# EAGLE board led_table_signals_unrouted (EAGLE 7.6.0)
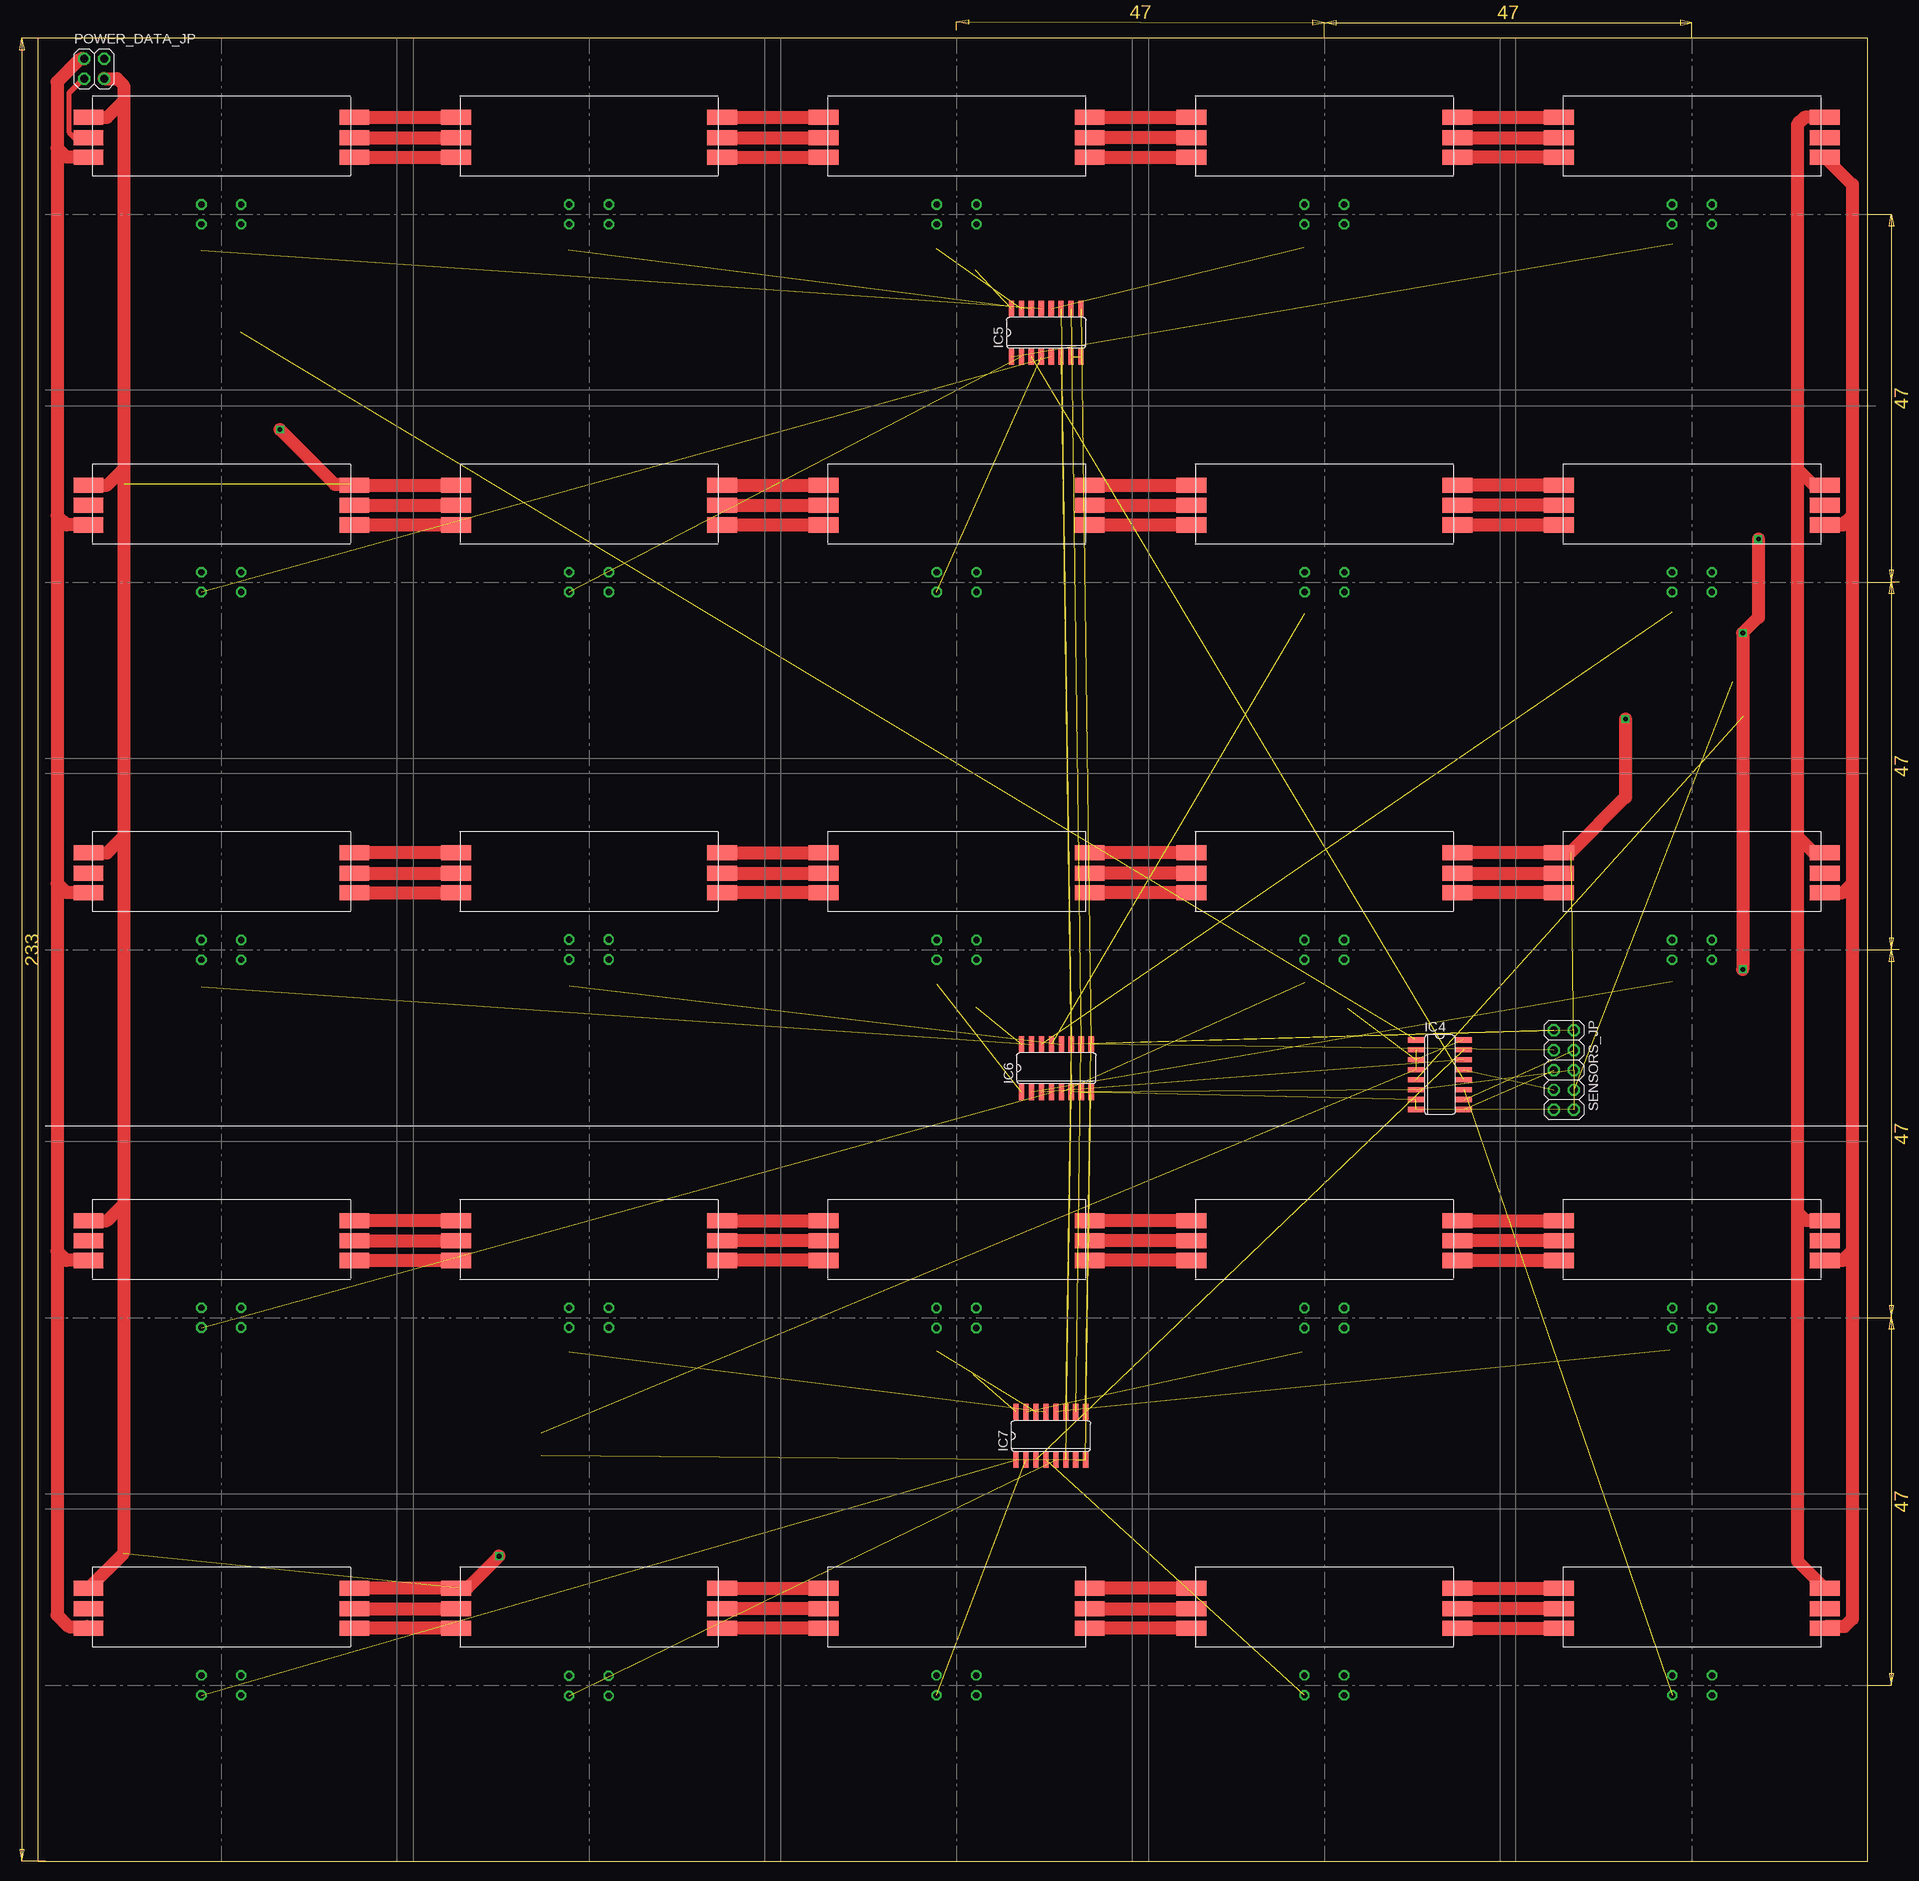
[diagram p0: board, top side]
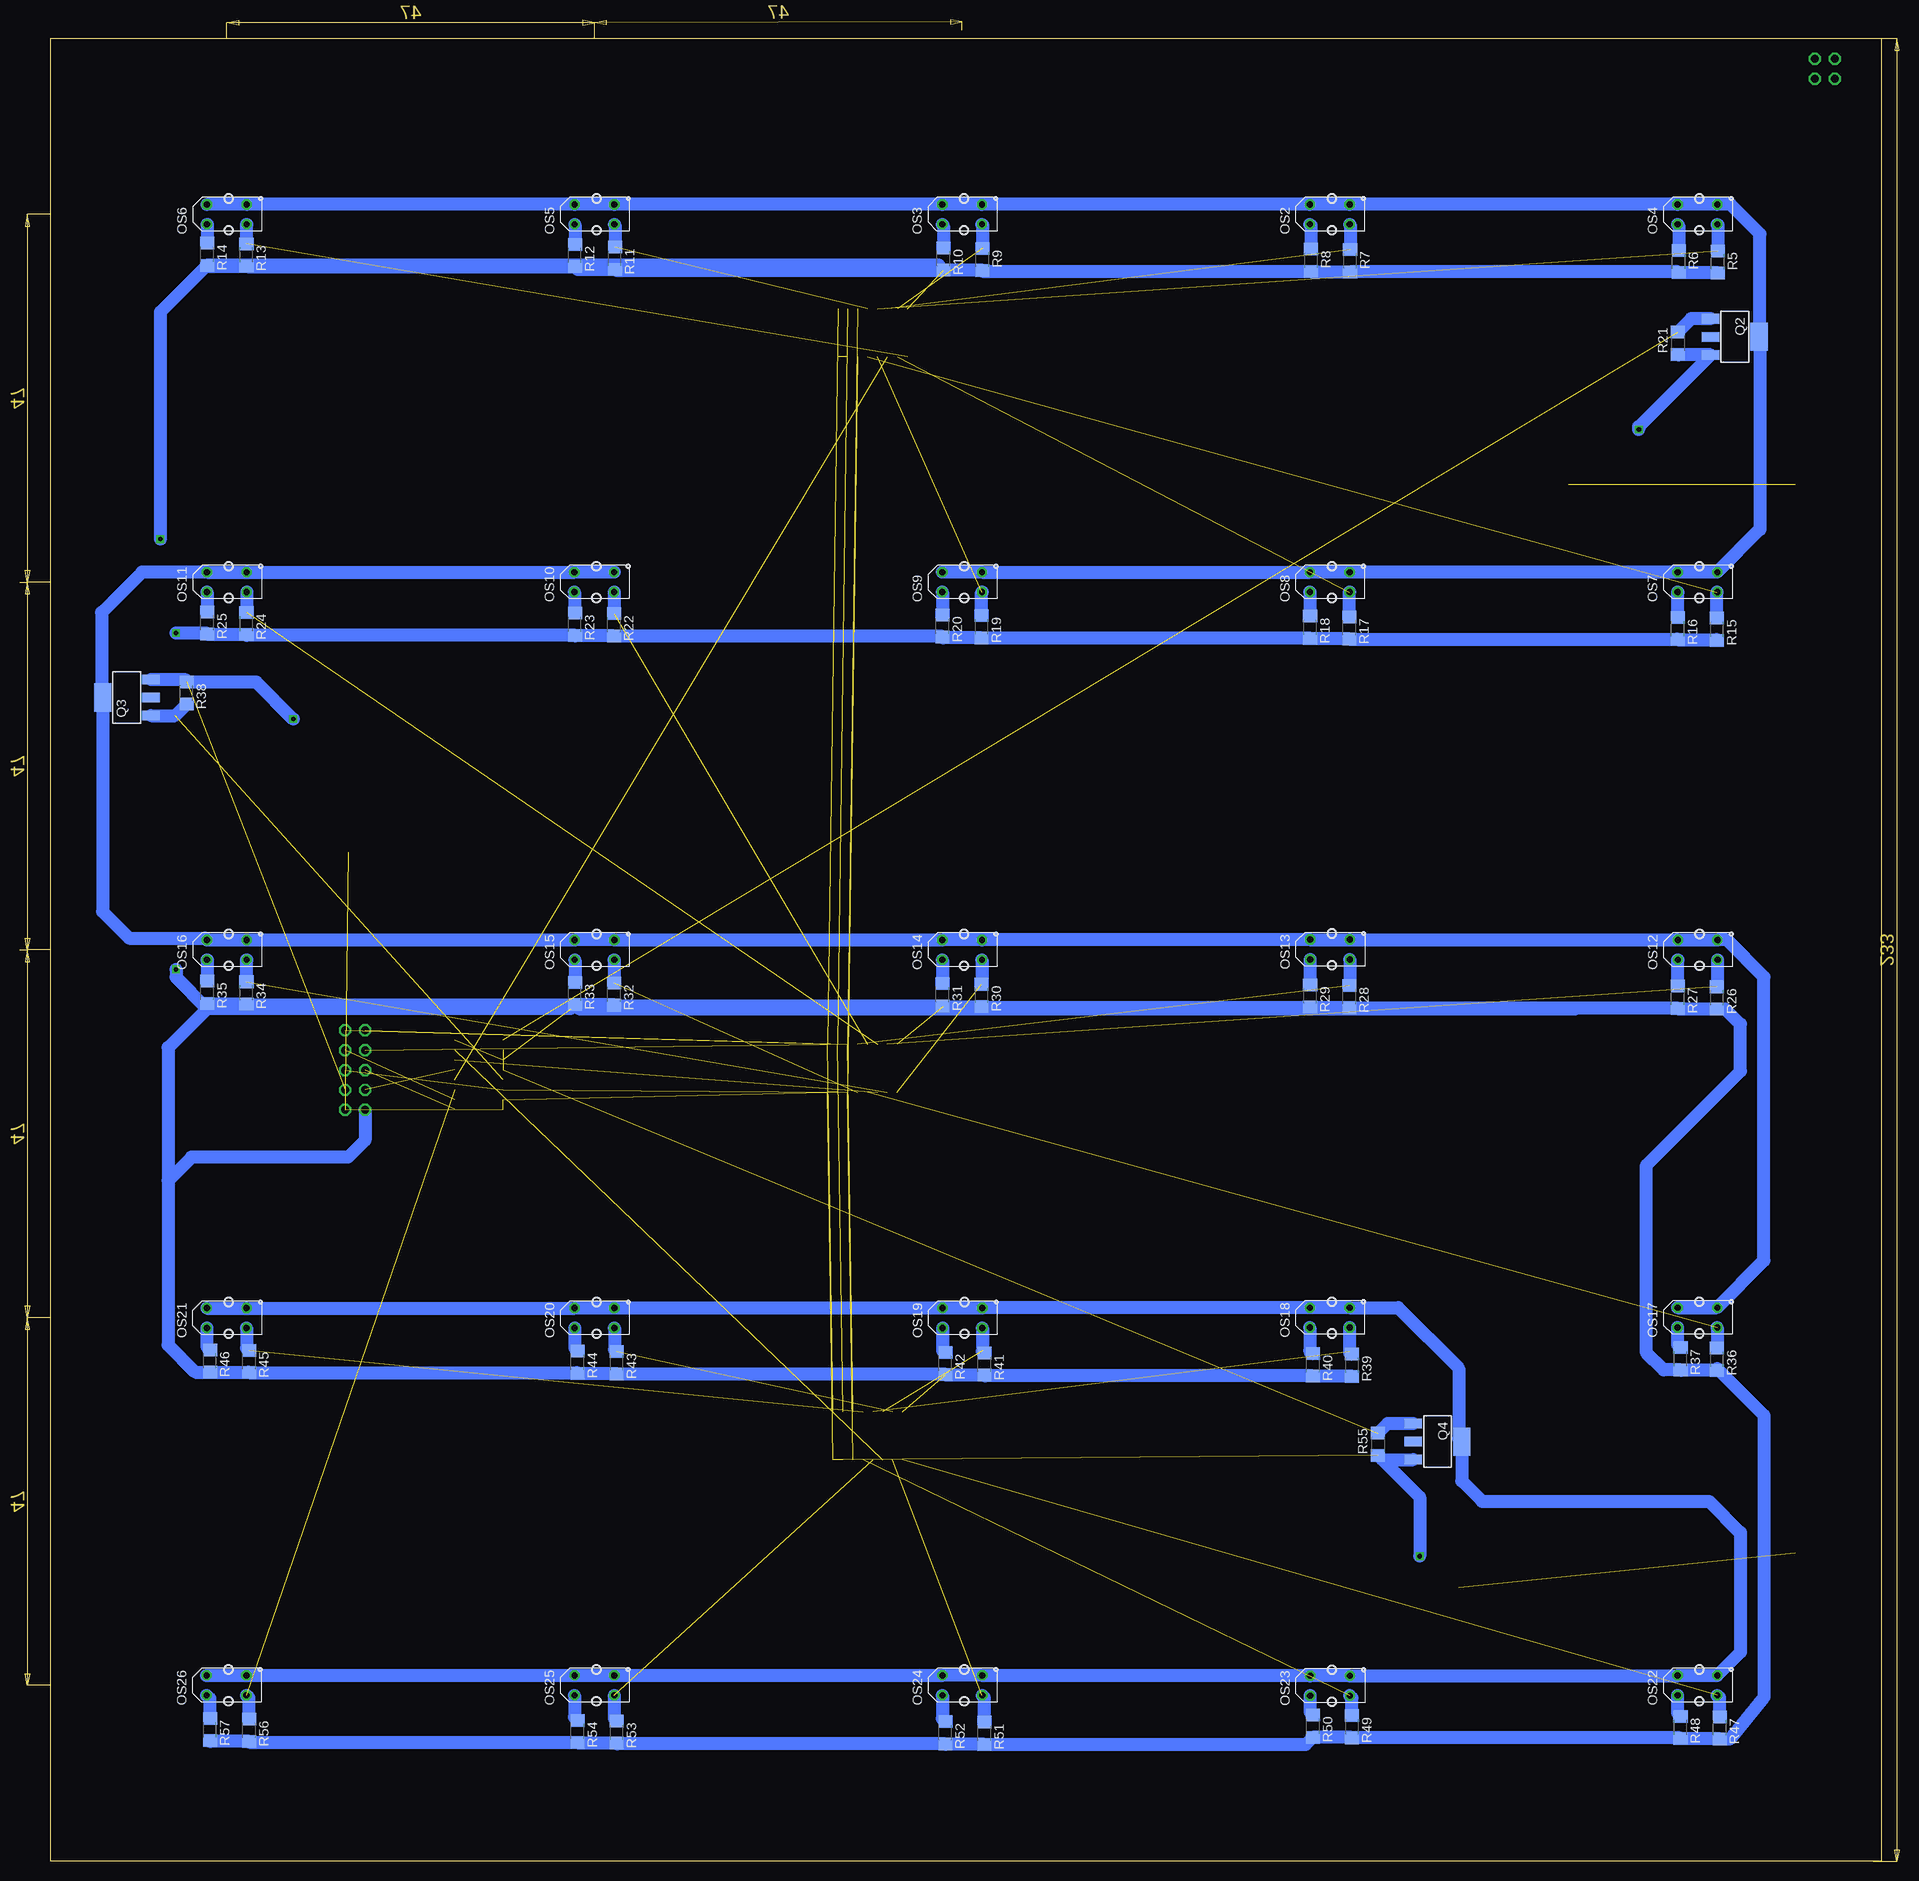
[diagram p1: board, bottom side, seen from below]

Size 234 x 233 mm. Coordinates in mm from the lower left corner, seen from the top.
Outline: 234,233 0,233 0,0 234,0 234,233
Copper layers (1*16): Top 0.035mm / dielectric 1.5mm / Bottom 0.035mm
Design rules "default": minimum track width 10mil, minimum drill 24mil, track to track 8mil, track to pad 8mil, pad to pad 8mil, via to via 8mil, smd to smd 8mil, copper to edge 40mil, drill to drill 8mil, minimum pad ring 10mil, minimum via ring 8mil, stop-mask expansion 4mil, vias tented up to drill 0mil, thermal gap 10mil

## Footprints (pad centres in the part's own frame; a part is rotated, then mirrored left to right if it is on the bottom)
SO16 = smd 0.66 x 2.032: 1 -4.445,-3.073; 2 -3.175,-3.073; 3 -1.905,-3.073; 4 -0.635,-3.073; 5 0.635,-3.073; 6 1.905,-3.073; 7 3.175,-3.073; 8 4.445,-3.073; 9 4.445,3.073; 10 3.175,3.073; 11 1.905,3.073; 12 0.635,3.073; 13 -0.635,3.073; 14 -1.905,3.073; 15 -3.175,3.073; 16 -4.445,3.073
TCRT5000 = drill 0.8 octagon: A -2.54,-1.27; C 2.54,-1.27; E 2.54,1.27; K -2.54,1.27
2X02 = drill 1.016 octagon: 1 -1.27,-1.27; 2 -1.27,1.27; 3 1.27,-1.27; 4 1.27,1.27
SOT223 = smd 1.219 x 2.235: 1 -2.311,-3.099; 2 0,-3.099; 3 2.311,-3.099 | smd 3.6 x 2.2: 4 0,3.099
R1206 = smd 1.6 x 1.803: 1 -1.422,0; 2 1.422,0
2X05 = drill 1.016 octagon: 1 -5.08,-1.27; 2 -5.08,1.27; 3 -2.54,-1.27; 4 -2.54,1.27; 5 0,-1.27; 6 0,1.27; 7 2.54,-1.27; 8 2.54,1.27; 9 5.08,-1.27; 10 5.08,1.27
WS_PIN = smd 1.93 x 3.81: DATA_IN 0.2,-17; DATA_OUT 0.2,17; GND_IN -2.4,-17; GND_OUT -2.4,17; VCC_IN 2.7,-17; VCC_OUT 2.7,17

## Placement (x,y rotation side)
IC4  4052D  [SO16]  179.28,100.54 270 top
IC5  4051D  [SO16]  128.95,195.38 0 top
IC6  4051D  [SO16]  130.25,101.38 0 top
IC7  4051D  [SO16]  129.55,54.38 0 top
OS2  [TCRT5000]  70.5,210.5 0 bottom
OS3  [TCRT5000]  117.51,210.5 0 bottom
OS4  [TCRT5000]  23.5,210.5 0 bottom
OS5  [TCRT5000]  164.5,210.5 0 bottom
OS6  [TCRT5000]  211.5,210.5 0 bottom
OS7  [TCRT5000]  23.5,163.5 0 bottom
OS8  [TCRT5000]  70.5,163.5 0 bottom
OS9  [TCRT5000]  117.49,163.5 0 bottom
OS10  [TCRT5000]  164.52,163.5 0 bottom
OS11  [TCRT5000]  211.5,163.5 0 bottom
OS12  [TCRT5000]  23.48,116.5 0 bottom
OS13  [TCRT5000]  70.48,116.55 0 bottom
OS14  [TCRT5000]  117.5,116.5 0 bottom
OS15  [TCRT5000]  164.5,116.5 0 bottom
OS16  [TCRT5000]  211.5,116.5 0 bottom
OS17  [TCRT5000]  23.5,69.5 0 bottom
OS18  [TCRT5000]  70.5,69.5 0 bottom
OS19  [TCRT5000]  117.46,69.45 0 bottom
OS20  [TCRT5000]  164.49,69.45 0 bottom
OS21  [TCRT5000]  211.52,69.45 0 bottom
OS22  [TCRT5000]  23.5,22.5 0 bottom
OS23  [TCRT5000]  70.48,22.45 0 bottom
OS24  [TCRT5000]  117.48,22.5 0 bottom
OS25  [TCRT5000]  164.51,22.5 0 bottom
OS26  [TCRT5000]  211.54,22.5 0 bottom
POWER_DATA_JP  [2X02]  7.23,229.11 0 top
Q2  N-HEXFET_SOT323-IRLL014N  [SOT223]  18.72,194.85 270 bottom
Q3  N-HEXFET_SOT323-IRLL014N  [SOT223]  224.28,148.75 90 bottom
Q4  N-HEXFET_SOT323-IRLL014N  [SOT223]  56.72,53.65 270 bottom
R5  10k  [R1206]  20.89,204.41 270 bottom
R6  100  [R1206]  25.89,204.49 270 bottom
R7  10k  [R1206]  67.89,204.57 270 bottom
R8  100  [R1206]  72.89,204.65 270 bottom
R9  10k  [R1206]  114.89,204.73 270 bottom
R10  100  [R1206]  119.89,204.81 270 bottom
R11  10k  [R1206]  161.89,204.89 270 bottom
R12  100  [R1206]  167,205.24 270 bottom
R13  10k  [R1206]  209,205.32 270 bottom
R14  100  [R1206]  214,205.4 270 bottom
R15  10k  [R1206]  21,157.48 270 bottom
R16  100  [R1206]  26,157.56 270 bottom
R17  10k  [R1206]  68,157.64 270 bottom
R18  100  [R1206]  73,157.72 270 bottom
R19  10k  [R1206]  115,157.8 270 bottom
R20  100  [R1206]  120,157.88 270 bottom
R21  10k  [R1206]  26,194.04 90 bottom
R22  10k  [R1206]  162,158.04 270 bottom
R23  100  [R1206]  167,158.12 270 bottom
R24  10k  [R1206]  209,158.2 270 bottom
R25  100  [R1206]  214,158.28 270 bottom
R26  10k  [R1206]  21,110.36 270 bottom
R27  100  [R1206]  26,110.44 270 bottom
R28  10k  [R1206]  68,110.52 270 bottom
R29  100  [R1206]  73,110.6 270 bottom
R30  10k  [R1206]  115,110.68 270 bottom
R31  100  [R1206]  120,110.76 270 bottom
R32  10k  [R1206]  162,110.84 270 bottom
R33  100  [R1206]  167,110.92 270 bottom
R34  10k  [R1206]  209,111 270 bottom
R35  100  [R1206]  214,111.08 270 bottom
R36  10k  [R1206]  21,64.16 270 bottom
R37  100  [R1206]  25.65,64.24 270 bottom
R38  10k  [R1206]  216.65,149.32 270 bottom
R39  10k  [R1206]  67.65,63.4 270 bottom
R40  100  [R1206]  72.65,63.48 270 bottom
R41  10k  [R1206]  114.65,63.56 270 bottom
R42  100  [R1206]  119.65,63.64 270 bottom
R43  10k  [R1206]  161.65,63.72 270 bottom
R44  100  [R1206]  166.65,63.8 270 bottom
R45  10k  [R1206]  208.65,63.88 270 bottom
R46  100  [R1206]  213.65,63.96 270 bottom
R47  10k  [R1206]  20.65,17.04 270 bottom
R48  100  [R1206]  25.65,17.12 270 bottom
R49  10k  [R1206]  67.65,17.2 270 bottom
R50  100  [R1206]  72.65,17.28 270 bottom
R51  10k  [R1206]  114.65,16.36 270 bottom
R52  100  [R1206]  119.65,16.44 270 bottom
R53  10k  [R1206]  161.65,16.52 270 bottom
R54  100  [R1206]  166.65,16.6 270 bottom
R55  10k  [R1206]  64.35,53.32 90 bottom
R56  10k  [R1206]  208.65,16.76 270 bottom
R57  100  [R1206]  213.65,16.84 270 bottom
SENSORS_JP  [2X05]  195.11,101.13 270 top
U$1  WS2812_ON_STRIP  [WS_PIN]  23.5,79.5 270 top
U$2  WS2812_ON_STRIP  [WS_PIN]  70.5,79.5 270 top
U$3  WS2812_ON_STRIP  [WS_PIN]  117.5,79.5 270 top
U$4  WS2812_ON_STRIP  [WS_PIN]  164.5,79.5 270 top
U$5  WS2812_ON_STRIP  [WS_PIN]  211.5,79.5 270 top
U$6  WS2812_ON_STRIP  [WS_PIN]  23.5,32.5 270 top
U$7  WS2812_ON_STRIP  [WS_PIN]  70.5,32.5 270 top
U$8  WS2812_ON_STRIP  [WS_PIN]  117.5,32.5 270 top
U$9  WS2812_ON_STRIP  [WS_PIN]  164.5,32.5 270 top
U$10  WS2812_ON_STRIP  [WS_PIN]  211.5,32.5 270 top
U$11  WS2812_ON_STRIP  [WS_PIN]  23.5,126.5 270 top
U$12  WS2812_ON_STRIP  [WS_PIN]  70.5,126.5 270 top
U$13  WS2812_ON_STRIP  [WS_PIN]  117.5,126.5 270 top
U$14  WS2812_ON_STRIP  [WS_PIN]  164.5,126.5 270 top
U$15  WS2812_ON_STRIP  [WS_PIN]  211.5,126.5 270 top
U$16  WS2812_ON_STRIP  [WS_PIN]  23.5,220.5 270 top
U$17  WS2812_ON_STRIP  [WS_PIN]  70.5,220.5 270 top
U$18  WS2812_ON_STRIP  [WS_PIN]  117.5,220.5 270 top
U$19  WS2812_ON_STRIP  [WS_PIN]  164.5,220.5 270 top
U$20  WS2812_ON_STRIP  [WS_PIN]  211.5,220.5 270 top
U$21  WS2812_ON_STRIP  [WS_PIN]  23.5,173.5 270 top
U$22  WS2812_ON_STRIP  [WS_PIN]  70.5,173.5 270 top
U$23  WS2812_ON_STRIP  [WS_PIN]  117.5,173.5 270 top
U$24  WS2812_ON_STRIP  [WS_PIN]  164.5,173.5 270 top
U$25  WS2812_ON_STRIP  [WS_PIN]  211.5,173.5 270 top

## Library data of the parts
IC4-IC7 = 40xx
OS2-OS26 = tcrt5000
POWER_DATA_JP SENSORS_JP = pinhead
Q2-Q4 = transistor-power
R5-R57 = rcl
U$1-U$25 = ws2812_on_strip

## Nets
+5V: IC4.3 IC4.16 IC5.16 IC6.16 IC7.16 R5.2 R6.2 R7.2 R8.2 R9.2 R10.2 R11.2 R12.2 R13.2 R14.2 R15.2 R16.2 R17.2 R18.2 R19.2 R20.2 R22.2 R23.2 R24.2 R25.2 R26.2 R27.2 R28.2 R29.2 R30.2 R31.2 R32.2 R33.2 R34.2 R35.2 R36.2 R37.2 R39.2 R40.2 R41.2 R42.2 R43.2 R44.2 R45.2 R46.2 R47.2 R48.2 R49.2 R50.2 R51.2 R52.2 R53.2 R54.2 R56.2 R57.2 SENSORS_JP.9
A: IC5.11 IC6.11 IC7.11 SENSORS_JP.1
B: IC5.10 IC6.10 IC7.10 SENSORS_JP.2
C: IC5.9 IC6.9 IC7.9 SENSORS_JP.3
D: IC4.10 SENSORS_JP.4
DATA_IN: POWER_DATA_JP.1 U$16.DATA_IN
DATA_OUT: U$10.DATA_OUT
E: IC4.9 SENSORS_JP.5
EN: IC4.6 IC5.6 IC6.6 IC7.6 SENSORS_JP.6
GND: IC4.7 IC4.8 IC5.7 IC5.8 IC6.7 IC6.8 IC7.7 IC7.8 POWER_DATA_JP.3 Q2.3 Q3.3 Q4.3 R21.1 R38.1 R55.1 SENSORS_JP.8 SENSORS_JP.10 U$1.GND_IN U$6.GND_IN U$11.GND_IN U$16.GND_IN U$21.GND_IN
GND_OUT: U$5.GND_OUT U$10.GND_OUT U$15.GND_OUT U$20.GND_OUT U$25.GND_OUT
LED_VCC: POWER_DATA_JP.2 U$1.VCC_IN U$6.VCC_IN U$11.VCC_IN U$16.VCC_IN U$21.VCC_IN
N$1: U$1.VCC_OUT U$2.VCC_IN
N$2: U$1.DATA_OUT U$2.DATA_IN
N$3: U$1.GND_OUT U$2.GND_IN
N$4: U$2.VCC_OUT U$3.VCC_IN
N$5: U$2.DATA_OUT U$3.DATA_IN
N$6: U$2.GND_OUT U$3.GND_IN
N$7: U$3.VCC_OUT U$4.VCC_IN
N$8: U$3.DATA_OUT U$4.DATA_IN
N$9: U$3.GND_OUT U$4.GND_IN
N$10: U$4.VCC_OUT U$5.VCC_IN
N$11: OS4.A R6.1
N$12: IC5.13 OS4.C R5.1
N$13: IC5.14 OS2.C R7.1
N$14: IC5.15 OS3.C R9.1
N$15: OS2.A R8.1
N$16: IC5.1 OS6.C R13.1
N$17: IC6.13 OS10.C R22.1
N$18: OS3.A R10.1
N$19: OS10.A R23.1
N$20: IC5.12 OS5.C R11.1
N$21: OS5.A R12.1
N$22: IC6.14 OS11.C R24.1
N$23: OS11.A R25.1
N$24: OS6.A R14.1
N$25: OS12.A R27.1
N$26: IC5.5 OS7.C R15.1
N$27: OS7.A R16.1
N$28: IC6.12 OS13.C R28.1
N$29: IC5.2 OS8.C R17.1
N$30: OS8.A R18.1
N$31: OS2.E OS2.K OS3.E OS3.K OS4.E OS4.K OS5.E OS5.K OS6.E OS6.K OS7.E OS7.K OS8.E OS8.K OS9.E OS9.K Q2.4
N$32: IC5.4 OS9.C R19.1
N$33: OS9.A R20.1
N$34: OS13.A R29.1
N$35: U$4.DATA_OUT U$5.DATA_IN
N$36: OS14.A R31.1
N$37: IC6.5 OS15.C R32.1
N$38: OS15.A R33.1
N$39: IC6.2 OS16.C R34.1
N$40: OS16.A R35.1
N$41: OS10.E OS10.K OS11.E OS11.K OS12.E OS12.K OS13.E OS13.K OS14.E OS14.K OS15.E OS15.K OS16.E OS16.K OS17.E OS17.K Q3.4
N$42: IC6.4 OS17.C R36.1
N$43: OS17.A R37.1
N$44: U$4.GND_OUT U$5.GND_IN
N$45: IC6.15 OS12.C R26.1
N$46: IC6.1 OS14.C R30.1
N$47: IC7.13 OS18.C R39.1
N$48: OS18.A R40.1
N$49: IC7.14 OS19.C R41.1
N$50: OS19.A R42.1
N$51: OS20.A R44.1
N$52: IC7.12 OS21.C R45.1
N$53: OS21.A R46.1
N$54: OS22.A R48.1
N$55: IC7.5 OS23.C R49.1
N$56: OS23.A R50.1
N$57: IC7.2 OS24.C R51.1
N$58: OS24.A R52.1
N$59: U$6.VCC_OUT U$7.VCC_IN
N$60: IC7.4 OS25.C R53.1
N$61: OS25.A R54.1
N$62: U$6.DATA_OUT U$7.DATA_IN
N$63: IC7.15 OS20.C R43.1
N$64: IC7.1 OS22.C R47.1
N$65: U$6.GND_OUT U$7.GND_IN
N$66: U$7.VCC_OUT U$8.VCC_IN
N$67: U$7.DATA_OUT U$8.DATA_IN
N$68: U$7.GND_OUT U$8.GND_IN
N$69: IC4.12 IC5.3
N$70: IC4.14 IC6.3
N$71: IC4.15 IC7.3
N$72: IC4.11 OS26.C R56.1
N$73: OS18.E OS18.K OS19.E OS19.K OS20.E OS20.K OS21.E OS21.K OS22.E OS22.K OS23.E OS23.K OS24.E OS24.K OS25.E OS25.K OS26.E OS26.K Q4.4
N$74: U$8.VCC_OUT U$9.VCC_IN
N$75: OS26.A R57.1
N$76: U$8.DATA_OUT U$9.DATA_IN
N$77: U$8.GND_OUT U$9.GND_IN
N$78: U$9.VCC_OUT U$10.VCC_IN
N$79: U$9.DATA_OUT U$10.DATA_IN
N$80: U$9.GND_OUT U$10.GND_IN
N$81: U$11.VCC_OUT U$12.VCC_IN
N$82: U$11.DATA_OUT U$12.DATA_IN
N$83: U$11.GND_OUT U$12.GND_IN
N$84: U$12.VCC_OUT U$13.VCC_IN
N$85: U$12.DATA_OUT U$13.DATA_IN
N$86: U$12.GND_OUT U$13.GND_IN
N$87: U$13.VCC_OUT U$14.VCC_IN
N$88: U$13.DATA_OUT U$14.DATA_IN
N$89: U$13.GND_OUT U$14.GND_IN
N$90: U$14.VCC_OUT U$15.VCC_IN
N$91: U$14.DATA_OUT U$15.DATA_IN
N$92: U$14.GND_OUT U$15.GND_IN
N$93: U$16.VCC_OUT U$17.VCC_IN
N$94: U$16.DATA_OUT U$17.DATA_IN
N$95: U$16.GND_OUT U$17.GND_IN
N$96: U$17.VCC_OUT U$18.VCC_IN
N$97: U$17.DATA_OUT U$18.DATA_IN
N$98: U$17.GND_OUT U$18.GND_IN
N$99: U$18.VCC_OUT U$19.VCC_IN
N$100: U$18.DATA_OUT U$19.DATA_IN
N$101: U$18.GND_OUT U$19.GND_IN
N$102: U$19.VCC_OUT U$20.VCC_IN
N$103: U$19.DATA_OUT U$20.DATA_IN
N$104: U$19.GND_OUT U$20.GND_IN
N$105: U$21.VCC_OUT U$22.VCC_IN
N$106: U$21.DATA_OUT U$22.DATA_IN
N$107: U$21.GND_OUT U$22.GND_IN
N$108: U$22.VCC_OUT U$23.VCC_IN
N$109: U$22.DATA_OUT U$23.DATA_IN
N$110: U$22.GND_OUT U$23.GND_IN
N$111: U$23.VCC_OUT U$24.VCC_IN
N$112: U$23.DATA_OUT U$24.DATA_IN
N$113: U$23.GND_OUT U$24.GND_IN
N$114: U$24.VCC_OUT U$25.VCC_IN
N$115: U$24.DATA_OUT U$25.DATA_IN
N$116: U$24.GND_OUT U$25.GND_IN
N$125: U$21.DATA_IN
SECTION_1_EN: IC4.1 Q2.1 R21.2
SECTION_2_EN: IC4.5 Q3.1 R38.2
SECTION_3_EN: IC4.2 IC4.4 Q4.1 R55.2
SENSOR: IC4.13 SENSORS_JP.7
VCC_OUT: U$5.VCC_OUT U$10.VCC_OUT U$15.VCC_OUT U$20.VCC_OUT U$25.VCC_OUT

## Tracks (layer width: path | path; a pad name or v marks a point on that pad's centre or on a via)
+5V  (via drill 0.6)  (5 unrouted)
  Top 1.676: v220,169 220,159 v218,157 v218,114
  Bottom 1.676: R13.2 213.92,203.9 R14.2 213.98,204 209,204 208.82,203.82 R12.2 166.65,203.47 R11.2 161.81,203.39 R10.2 | R10.2 114.97,203.39 R9.2 114.81,203.23 R8.2 72.81,203.15 R7.2 25.97,203.15 R6.2 20.97,203.07 R5.2 | R15.2 21.08,156.14 R16.2 26.08,156.22 R17.2 68.08,156.3 R18.2 73.08,156.38 R19.2 119.92,156.38 R20.2 120.16,156.62 R22.2 166.92,156.62 R23.2 208.92,156.7 R24.2 213.92,156.78 R25.2 214.14,157 v218,157 | R39.2 67.73,62.06 R40.2 114.57,62.06 R41.2 119.57,62.14 R42.2 119.73,62.3 R43.2 161.73,62.38 R44.2 166.73,62.46 R45.2 208.73,62.54 R46.2 215.54,62.54 219,66 219,87 | R36.2 25.57,62.74 R37.2 | R37.2 21.18,62.82 21,63 15,57 15,21 19.38,15.62 R47.2 20.73,15.7 R48.2 25.73,15.78 R49.2 67.73,15.86 R50.2 73.57,14.94 R51.2 119.57,14.94 R52.2 161.57,15.02 R53.2 166.57,15.1 R54.2 208.49,15.18 R56.2 213.57,15.34 R57.2 | R35.2 213.92,109.58 R34.2 208.92,109.5 R33.2 | R32.2 162.08,109.5 R33.2 | 162,109 166.5,109 R33.2 | 162,109 161.66,109.34 R31.2 119.92,109.26 R30.2 114.92,109.18 R29.2 72.92,109.1 R28.2 26.08,109.1 R27.2 25.92,108.94 R26.2 19.94,108.94 18,107 18,101 30,89 30,65 27.82,62.82 R37.2 | 162,109 39,109 | R33.2 167.5,109 214,109 | 214,109 219,104 219,87 | R10.2 120.5,204 214,204 220,198 v220,169 | v218,114 218,113 214,109 | SENSORS_JP.9 193.84,92.16 196,90 216,90 219,87
A  (3 unrouted)
B  (3 unrouted)
C  (3 unrouted)
D  (1 unrouted)
DATA_IN
  Top 0.61: POWER_DATA_JP.1 5.84,227.84 4,226 4,221 5,220 6.2,220 U$16.DATA_IN
E  (1 unrouted)
EN  (4 unrouted)
GND  (via drill 0.6)  (13 unrouted)
  Top 1.676: 11,225 11,227 10.16,227.84 POWER_DATA_JP.3 | 11,225 11,178 | 11,178 11,131 | 11,131 11,84 | 11,84 11,39.4 U$6.GND_IN | U$1.GND_IN 8.9,81.9 11,84 | U$11.GND_IN 8.9,128.9 11,131 | U$21.GND_IN 8.9,175.9 11,178 | U$16.GND_IN 8.9,222.9 11,225 | v59,39 55,35 54,35 | v31,183 38,176 40,176 | v203,146 203,136 196,129
  Bottom 1.676: R21.1 25.92,192.54 Q2.3 31,183.36 v31,183 | Q4.3 63.79,51.34 R55.1 59,46.55 v59,39 | Q3.3 216.97,151.06 arc90 R38.1 207.74,150.74 v203,146
GND_OUT
  Top 1.676: U$20.GND_OUT 225.9,222.9 225,222 225,178 | 225,178 225,131 | 225,131 225,83 | 225,83 225,38.4 U$10.GND_OUT | U$25.GND_OUT 227.1,175.9 225,178 | U$15.GND_OUT 227.1,128.9 225,131 | U$5.GND_OUT 226.1,81.9 225,83
LED_VCC
  Top 1.676: POWER_DATA_JP.2 5.48,230.38 2.5,227.4 2.5,219 | 2.5,219 2.5,172 | 2.5,172 2.5,125 | 2.5,125 2.5,78 | 2.5,78 2.5,31.5 4,30 6.3,30 U$6.VCC_IN | U$1.VCC_IN 3.7,76.8 2.5,78 | U$11.VCC_IN 3.7,123.8 2.5,125 | U$21.VCC_IN 3.7,170.8 2.5,172 | U$16.VCC_IN 3.7,217.8 2.5,219
N$1
  Top 1.676: U$1.VCC_OUT U$2.VCC_IN
N$2
  Top 1.676: U$1.DATA_OUT U$2.DATA_IN
N$3
  Top 1.676: U$2.GND_IN U$1.GND_OUT
N$4
  Top 1.676: U$3.VCC_IN U$2.VCC_OUT
N$5
  Top 1.676: U$3.DATA_IN U$2.DATA_OUT
N$6
  Top 1.676: U$2.GND_OUT U$3.GND_IN
N$7
  Top 1.676: U$4.VCC_IN U$3.VCC_OUT
N$8
  Top 1.676: U$4.DATA_IN U$3.DATA_OUT
N$9
  Top 1.676: U$4.GND_IN U$3.GND_OUT
N$10
  Top 1.676: U$4.VCC_OUT U$5.VCC_IN
N$11
  Bottom 1.676: OS4.A 25.89,209.08 R6.1
N$12  (1 unrouted)
  Bottom 1.676: OS4.C 20.89,209.16 R5.1
N$13  (1 unrouted)
  Bottom 1.676: OS2.C 67.89,209.16 R7.1
N$14  (1 unrouted)
  Bottom 1.676: OS3.C 114.89,209.15 R9.1
N$15
  Bottom 1.676: OS2.A 72.89,209.08 R8.1
N$16  (1 unrouted)
  Bottom 1.676: OS6.C 209,209.19 R13.1
N$17  (1 unrouted)
  Bottom 1.676: OS10.C 161.98,159.48 R22.1
N$18
  Bottom 1.676: OS3.A 119.89,209.07 R10.1
N$19
  Bottom 1.676: OS10.A 167.06,159.6 R23.1
N$20  (1 unrouted)
  Bottom 1.676: OS5.C 161.89,209.16 R11.1
N$21
  Bottom 1.676: OS5.A 167,209.19 R12.1
N$22  (1 unrouted)
  Bottom 1.676: OS11.C 208.96,159.66 R24.1
N$23
  Bottom 1.676: OS11.A 214.04,159.74 R25.1
N$24
  Bottom 1.676: OS6.A 214,209.19 R14.1
N$25
  Bottom 1.676: R27.1 26,115.21 OS12.A
N$26  (1 unrouted)
  Bottom 1.676: R15.1 21,162.19 OS7.C
N$27
  Bottom 1.676: R16.1 26,162.19 OS7.A
N$28  (1 unrouted)
  Bottom 1.676: OS13.C 67.94,112 R28.1
N$29  (1 unrouted)
  Bottom 1.676: R17.1 68,162.19 OS8.C
N$30
  Bottom 1.676: R18.1 73,162.19 OS8.A
N$31
  Bottom 1.676: OS6.K OS6.E OS5.K OS5.E OS3.K OS3.E OS2.K OS2.E OS4.K OS4.E 19.27,211.77 15.5,208 15.5,194.97 Q2.4 15.5,194.73 15.5,170.23 OS7.E OS7.K OS8.E OS8.K OS9.E OS9.K
N$32  (1 unrouted)
  Bottom 1.676: R19.1 115,162.18 OS9.C
N$33
  Bottom 1.676: OS9.A 120.03,159.33 R20.1
N$34
  Bottom 1.676: OS13.A 73.02,112.04 R29.1
N$35
  Top 1.676: U$5.DATA_IN U$4.DATA_OUT
N$36
  Bottom 1.676: OS14.A 120.04,112.22 arc-90 R31.1
N$37  (1 unrouted)
  Bottom 1.676: OS15.C 162,115.19 R32.1
N$38
  Bottom 1.676: OS15.A 167,115.19 R33.1
N$39  (1 unrouted)
  Bottom 1.676: OS16.C 209,115.19 R34.1
N$40
  Bottom 1.676: OS16.A 214,115.19 R35.1
N$41
  Bottom 1.676: OS10.E OS10.K OS11.E OS11.K 222.33,164.77 227.5,159.6 227.5,148.87 Q3.4 227.38,121.38 224,118 214.27,118 OS16.K OS16.E OS15.K OS15.E OS14.K OS14.E 114.91,117.82 OS13.K OS13.E 26.07,117.82 OS12.K OS12.E 19.77,117.77 15,113 15,76.8 21.03,70.77 OS17.K OS17.E
N$42  (1 unrouted)
  Bottom 1.676: OS17.C 20.96,65.62 R36.1
N$43
  Bottom 1.676: OS17.A 26.04,66.05 R37.1
N$44
  Top 1.676: U$4.GND_OUT U$5.GND_IN
N$45  (1 unrouted)
  Bottom 1.676: OS12.C 20.94,111.84 R26.1
N$46  (1 unrouted)
  Bottom 1.676: OS14.C 114.96,112.14 arc90 R30.1
N$47  (1 unrouted)
  Bottom 1.676: OS18.C 67.96,65.13 arc-90 R39.1
N$48
  Bottom 1.676: OS18.A 73.04,65.29 arc-90 R40.1
N$49  (1 unrouted)
  Bottom 1.676: OS19.C 114.92,65.25 arc-90 R41.1
N$50
  Bottom 1.676: OS19.A 120,65.41 arc-90 R42.1
N$51
  Bottom 1.676: OS20.A 167.03,65.6 R44.1
N$52  (1 unrouted)
  Bottom 1.676: OS21.C 208.98,65.63 R45.1
N$53
  Bottom 1.676: OS21.A 214.06,65.79 R46.1
N$54
  Bottom 1.676: OS22.A 26.04,18.93 R48.1
N$55  (1 unrouted)
  Bottom 1.676: R49.1 67.65,20.89 OS23.C
N$56
  Bottom 1.676: OS23.A 73.02,19.07 R50.1
N$57  (1 unrouted)
  Bottom 1.676: R51.1 114.65,20.94 OS24.C
N$58
  Bottom 1.676: OS24.A 120.02,18.23 R52.1
N$59
  Top 1.676: U$7.VCC_IN U$6.VCC_OUT
N$60  (1 unrouted)
  Bottom 1.676: OS25.C 161.97,18.26 R53.1
N$61
  Bottom 1.676: OS25.A 167.05,18.42 R54.1
N$62
  Top 1.676: U$6.DATA_OUT U$7.DATA_IN
N$63  (1 unrouted)
  Bottom 1.676: OS20.C 161.95,65.44 R43.1
N$64  (1 unrouted)
  Bottom 1.676: R47.1 20.65,20.92 OS22.C
N$65
  Top 1.676: U$7.GND_IN U$6.GND_OUT
N$66
  Top 1.676: U$8.VCC_IN U$7.VCC_OUT
N$67
  Top 1.676: U$8.DATA_IN U$7.DATA_OUT
N$68
  Top 1.676: U$7.GND_OUT U$8.GND_IN
N$69  (1 unrouted)
N$70  (1 unrouted)
N$71  (1 unrouted)
N$72  (1 unrouted)
  Bottom 1.676: R56.1 208.65,20.88 OS26.C
N$73
  Bottom 1.676: OS21.K OS21.E OS20.K OS20.E OS19.K OS19.E 114.87,70.77 OS18.K OS18.E 61.77,70.77 54,63 54,54.03 Q4.4 53.62,48.62 51,46 22,46 18,42 18,26.73 OS22.E OS22.K 26.09,23.72 OS23.E OS23.K 73.07,23.77 OS24.E OS24.K OS25.E OS25.K OS26.E OS26.K
N$74
  Top 1.676: U$9.VCC_IN U$8.VCC_OUT
N$75
  Bottom 1.676: R57.1 213.65,20.8 OS26.A
N$76
  Top 1.676: U$8.DATA_OUT U$9.DATA_IN
N$77
  Top 1.676: U$9.GND_IN U$8.GND_OUT
N$78
  Top 1.676: U$9.VCC_OUT U$10.VCC_IN
N$79
  Top 1.676: U$10.DATA_IN U$9.DATA_OUT
N$80
  Top 1.676: U$9.GND_OUT U$10.GND_IN
N$81
  Top 1.676: U$11.VCC_OUT U$12.VCC_IN
N$82
  Top 1.676: U$11.DATA_OUT U$12.DATA_IN
N$83
  Top 1.676: U$12.GND_IN U$11.GND_OUT
N$84
  Top 1.676: U$13.VCC_IN U$12.VCC_OUT
N$85
  Top 1.676: U$12.DATA_OUT U$13.DATA_IN
N$86
  Top 1.676: U$12.GND_OUT U$13.GND_IN
N$87
  Top 1.676: U$14.VCC_IN U$13.VCC_OUT
N$88
  Top 1.676: U$14.DATA_IN U$13.DATA_OUT
N$89
  Top 1.676: U$14.GND_IN U$13.GND_OUT
N$90
  Top 1.676: U$15.VCC_IN U$14.VCC_OUT
N$91
  Top 1.676: U$14.DATA_OUT U$15.DATA_IN
N$92
  Top 1.676: U$15.GND_IN U$14.GND_OUT
N$93
  Top 1.676: U$16.VCC_OUT U$17.VCC_IN
N$94
  Top 1.676: U$16.DATA_OUT U$17.DATA_IN
N$95
  Top 1.676: U$16.GND_OUT 53,222.9 53,223 53.5,223 U$17.GND_IN
N$96
  Top 1.676: U$17.VCC_OUT U$18.VCC_IN
N$97
  Top 1.676: U$17.DATA_OUT U$18.DATA_IN
N$98
  Top 1.676: U$17.GND_OUT U$18.GND_IN
N$99
  Top 1.676: U$18.VCC_OUT U$19.VCC_IN
N$100
  Top 1.676: U$19.DATA_IN U$18.DATA_OUT
N$101
  Top 1.676: U$18.GND_OUT U$19.GND_IN
N$102
  Top 1.676: U$20.VCC_IN U$19.VCC_OUT
N$103
  Top 1.676: U$19.DATA_OUT U$20.DATA_IN
N$104
  Top 1.676: U$19.GND_OUT U$20.GND_IN
N$105
  Top 1.676: U$21.VCC_OUT U$22.VCC_IN
N$106
  Top 1.676: U$21.DATA_OUT U$22.DATA_IN
N$107
  Top 1.676: U$21.GND_OUT U$22.GND_IN
N$108
  Top 1.676: U$22.VCC_OUT U$23.VCC_IN
N$109
  Top 1.676: U$22.DATA_OUT U$23.DATA_IN
N$110
  Top 1.676: U$22.GND_OUT U$23.GND_IN
N$111
  Top 1.676: U$23.VCC_OUT U$24.VCC_IN
N$112
  Top 1.676: U$23.DATA_OUT U$24.DATA_IN
N$113
  Top 1.676: U$23.GND_OUT U$24.GND_IN
N$114
  Top 1.676: U$24.VCC_OUT U$25.VCC_IN
N$115
  Top 1.676: U$25.DATA_IN U$24.DATA_OUT
N$116
  Top 1.676: U$25.GND_IN U$24.GND_OUT
SECTION_1_EN  (1 unrouted)
  Bottom 1.676: Q2.1 24.3,197.16 R21.2
SECTION_2_EN  (1 unrouted)
  Bottom 1.676: Q3.1 218.11,146.44 R38.2
SECTION_3_EN  (2 unrouted)
  Bottom 1.676: Q4.1 63.13,55.96 R55.2
SENSOR  (1 unrouted)
VCC_OUT
  Top 1.676: U$20.VCC_OUT 232,214.3 232,172 | 232,172 232,125 | 232,125 232,78 | 232,78 232,31 231,30 228.7,30 U$10.VCC_OUT | U$5.VCC_OUT 230.8,76.8 232,78 | U$15.VCC_OUT 230.8,123.8 232,125 | U$25.VCC_OUT 230.8,170.8 232,172